# EAGLE board Drivetrain_control (EAGLE 9.3.2)

Size 92.69 x 107.62 mm. Coordinates in mm from the lower left corner, seen from the top.
Outline: 0,0 92.69,0 92.69,107.62 0,107.62 0,0
Copper layers (1*16): Top 0.035mm / dielectric 1.5mm / Bottom 0.035mm
Design rules "default": minimum track width 6mil, minimum drill 0.35mm, track to track 6mil, track to pad 6mil, pad to pad 6mil, via to via 6mil, smd to smd 6mil, copper to edge 40mil, drill to drill 6mil, minimum pad ring 10mil, minimum via ring 8mil, stop-mask expansion 4mil, vias tented up to drill 0mil, thermal gap 10mil

## Footprints (pad centres in the part's own frame; a part is rotated, then mirrored left to right if it is on the bottom)
DIL08 = drill 0.813 pad 1.27: 1 -3.81,-3.81; 2 -1.27,-3.81; 3 1.27,-3.81; 4 3.81,-3.81; 5 3.81,3.81; 6 1.27,3.81; 7 -1.27,3.81; 8 -3.81,3.81
SSW-110-02-G-S = drill 1 pad 1.5 octagon: 1 -11.43,0; 2 -8.89,0; 3 -6.35,0; 4 -3.81,0; 5 -1.27,0; 6 1.27,0; 7 3.81,0; 8 6.35,0; 9 8.89,0; 10 11.43,0
TO220BH = drill 1.118 long: D 0,-6.35; G -2.54,-6.35; S 2.54,-6.35 | hole 3.302: 0,11.176
R0805 = smd 1.3 x 1.5: 1 -0.95,0; 2 0.95,0
5566-8 = drill 1.4 square: 1 6.3,-2.75; 2 2.1,-2.75; 3 -2.1,-2.75; 4 -6.3,-2.75; 5 6.3,2.75; 6 2.1,2.75; 7 -2.1,2.75; 8 -6.3,2.75 | hole 3: 11,2.29; -11,2.29

## Placement (x,y rotation side)
IC1  LM358N  [DIL08]  68.58,60.96 270 top
J1  SSW-110-02-G-S  [SSW-110-02-G-S]  10.16,86.36 270 top
J2  SSW-110-02-G-S  [SSW-110-02-G-S]  55.88,86.36 90 top
J3  SSW-110-02-G-S  [SSW-110-02-G-S]  12.7,86.36 270 top
J4  SSW-110-02-G-S  [SSW-110-02-G-S]  53.34,86.36 90 top
J5  SSW-110-02-G-S  [SSW-110-02-G-S]  10.16,22.86 270 top
J6  SSW-110-02-G-S  [SSW-110-02-G-S]  55.88,22.86 90 top
J7  SSW-110-02-G-S  [SSW-110-02-G-S]  12.7,22.86 270 top
J8  SSW-110-02-G-S  [SSW-110-02-G-S]  53.34,22.86 90 top
Q1  IRFI540NPBF  [TO220BH]  81.28,19.05 0 top
Q2  IRFI540NPBF  [TO220BH]  80.01,8.89 0 top
Q3  IRFI540NPBF  [TO220BH]  82.55,33.02 0 top
Q4  IRFI540NPBF  [TO220BH]  72.39,7.62 0 top
Q5  IRFI540NPBF  [TO220BH]  68.58,33.02 0 top
R1  [R0805]  59.69,59.69 0 top
R2  [R0805]  76.2,64.77 0 top
R3  [R0805]  76.2,59.69 0 top
R4  [R0805]  76.2,54.61 0 top
SERVO_CONN  5566-8  [5566-8]  83.82,92.71 270 top

## Library data of the parts
IC1 = linear
J1-J8 = con-samtec; MF: Samtec Inc.; MPN: SSW-110-02-G-S; OC_FARNELL: unknown; OC_NEWARK: 11P9482
Q1-Q5 = transistor-power
R1-R4 = resistor
SERVO_CONN = con-molex; MF: MOLEX; OC_FARNELL: unknown; OC_NEWARK: unknown

## Nets
+3V3: J1.1 J5.1
+5V: J3.1 J7.1
ADCA0: J3.10
ADCIN1: J3.3
ADCIN15: J7.3
ADCINA2: J3.9
ADCINA3: J3.6
ADCINA4: J7.9
ADCINA5: J7.6
ADCINB2: J3.8
ADCINB3: J3.5
ADCINB4: J7.8
ADCINB5: J7.5
ADCINC2: J3.7
ADCINC3: J3.4
ADCINC4: J7.7
ADCINC5: J7.4
BRAKE_SOLENOID: Q5.D
EN_SERVO: Q1.D
FS1_MC: Q2.D
FWD_MC: Q3.D
GND: J2.10 J3.2 J6.10 J7.2 Q1.S Q2.S Q3.S Q4.S Q5.S R1.1 R3.1
GPIO1/PWMOUT1B: J4.9
GPIO2/PWMOUT2A: J4.8
GPIO3/PWMOUT2B: J4.7
GPIO4/PWMOUT3A: J4.6
GPIO5/PWMOUT3B: J4.5
GPIO6/PWMOUT4A: J8.10
GPIO7/PWMOUT4B: J8.9
GPIO8/PWMOUT5A: J8.8
GPIO9/PWMOUT5B: J8.7
GPIO10/PWMOUT6A: J8.6
GPIO11/PWMOUT6B: J8.5
GPIO14/OPXBAR3: J8.4
GPIO15/OPXBAR4: J8.3
GPIO16/OPXBAR7: J4.3
GPIO18: J1.4
GPIO19: J1.3
GPIO22: J1.8
GPIO24/OPXBAR1: J4.4
GPIO25/OPXBAR2: J6.1
GPIO26/SD2D2: J6.3
GPIO27/SD2CLK2: J6.2
GPIO29/OPXBAR6: J2.1
GPIO32: J1.2
GPIO40/I2CSDAB/J5: J5.10
GPIO41/I2CSCLB/J5: J5.9
GPIO52/J5: J5.8
GPIO56/SCICTX(<-MCU): J5.4
GPIO58/SPIAMOSI: J2.5
GPIO59/SPIAMISO: J2.4
GPIO60/SPICLKA: J1.7
GPIO61/SPIACS: J2.9
GPIO63/SPIBMOSI: J6.5
GPIO64/SPIBMISO: J6.4
GPIO65/SPIBCLK: J5.7
GPIO66/SPIBCS: J6.9
GPIO67: J1.5
GPIO94: J5.6
GPIO95: J5.2
GPIO97: J5.5
GPIO104/I2CSDAA/J1: J1.10
GPIO105/I2SSCLA/J1: J1.9
GPIO111: J1.6
GPIO122/SD1D1: J2.7
GPIO123/SD1CLK1: J2.8
GPIO124/SD1D2: J2.3
GPIO125/SD1CLK2: J2.2
GPIO130/SD2D1: J6.7
GPIO131/SD2CLK1: J6.8
GPIO139/SCICRX(->MCU): J5.3
N$1: IC1.6 R3.2 R4.2
N$2: IC1.7 R4.1
N$3: IC1.2 R1.2 R2.2
N$4: IC1.1 R2.1
N$5: Q1.G
N$6: Q4.G
N$7: Q2.G
N$8: Q5.G
N$9: Q3.G
PWM/BASED/DAC1: J4.2
PWM/BASED/DAC2: J4.1
PWM/BASED/DAC3: J8.2
PWM/BASED/DAC4: J8.1
RESET: J2.6 J6.6
REV_MC: Q4.D
STEERING_PWM: IC1.3 J4.10
THROTTLE_DAC: IC1.5 J7.10
V+: IC1.8
V-: IC1.4

## Tracks (layer width: path | path; a pad name or v marks a point on that pad's centre or on a via)
+3V3  (1 unrouted)
+5V  (1 unrouted)
GND  (10 unrouted)
N$1  (2 unrouted)
N$2  (1 unrouted)
N$3  (2 unrouted)
N$4  (1 unrouted)
RESET  (1 unrouted)
STEERING_PWM  (1 unrouted)
THROTTLE_DAC  (1 unrouted)